# Altium PCB T12 holder part2.PcbDoc
Units mil, origin at the board's own origin, x right, y up, seen from the top; angles counter-clockwise.
Board outline 2915.05 x 434.1 mil, 2 copper layers (Top Layer, Bottom Layer); 10 components, 8 nets, 39 pads, 23 vias.
Unrouted connection lines stored in the file: 1.
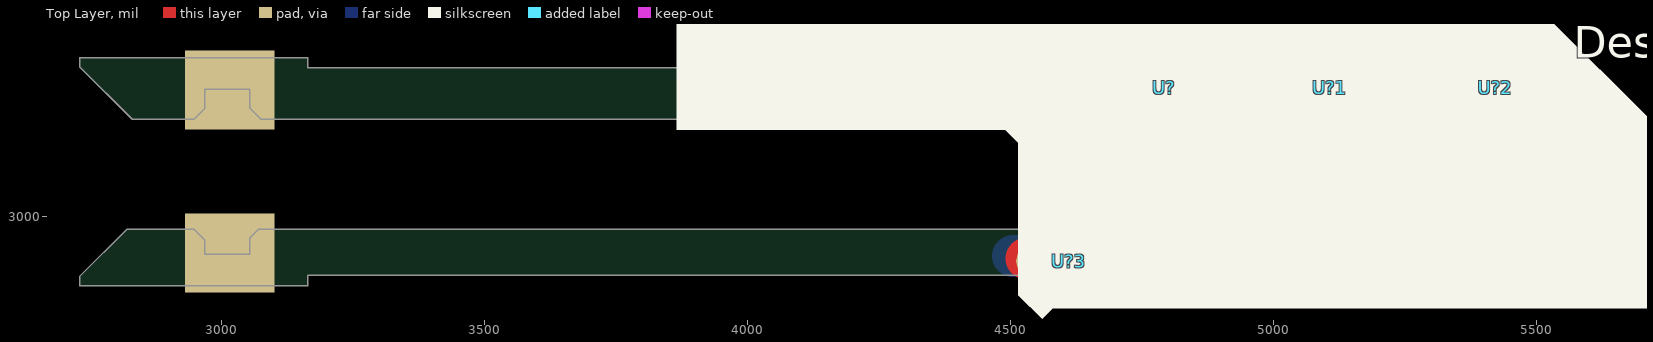
[diagram p0: Top Layer view]
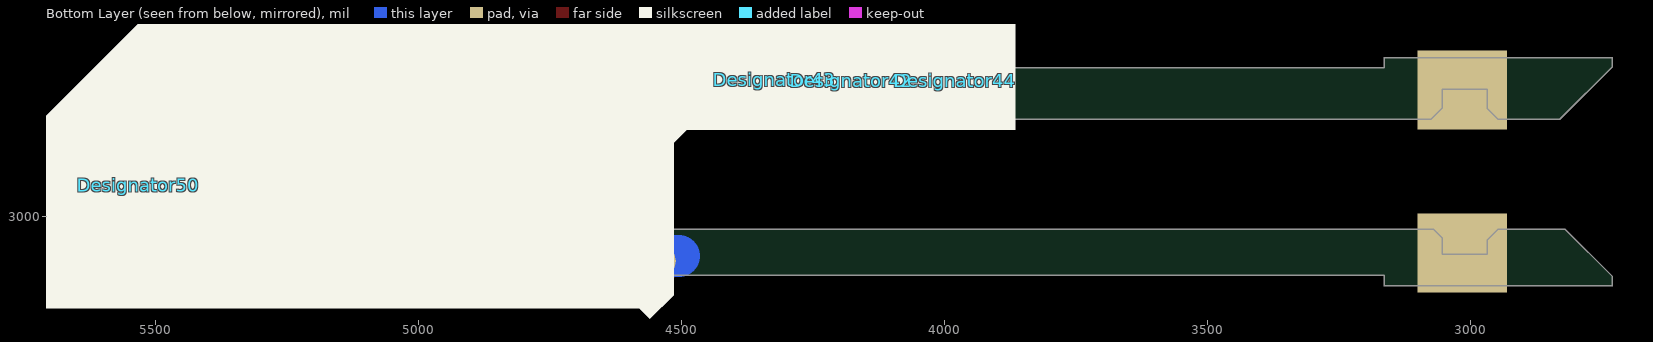
[diagram p1: Bottom Layer view, seen from below]
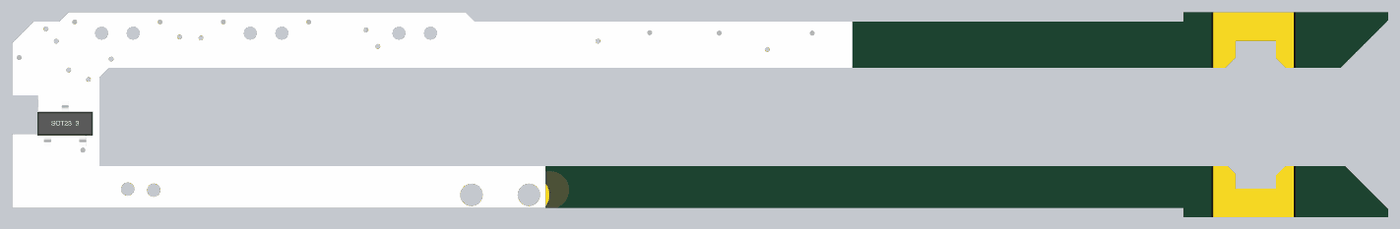
[diagram p2: 3D render of the assembled board from below, using the file's embedded part models]

## Layer stack, top to bottom
Top Solder: solder mask 0.4, Solder Resist, Dk 3.5
Top Layer: signal copper 1.4
Dielectric 1: dielectric 12.6, FR-4, Dk 4.8
Bottom Layer: signal copper 1.4
Bottom Solder: solder mask 0.4, Solder Resist, Dk 3.5

## Board outline
2729.49,2885 cw(c2730,2885) 2729.64,2885.36 2819.64,2975.36 cw(c2820,2975) 2820,2975.51 2946.85,2975.51 cw(c2946.85,2975) 2947.21,2975.36 2967.21,2955.36 cw(c2966.85,2955) 2967.37,2955 2967.37,2928.03 3052.95,2928.03 3052.95,2958.46 cw(c3053.46,2958.46) 3053.1,2958.83 3069.64,2975.36 cw(c3070,2975) 3070,2975.51 5459.48,2975.51 5459.48,3164.79 5439.79,3184.49 3075,3184.49 cw(c3075,3185) 3074.64,3184.64 3053.1,3206.17 cw(c3053.46,3206.54) 3052.95,3206.54 3052.95,3241.97 2967.37,3241.97 2967.37,3205 cw(c2966.85,3205) 2967.21,3204.64 2947.21,3184.64 cw(c2946.85,3185) 2946.85,3184.49 2830,3184.49 cw(c2830,3185) 2829.64,3184.64 2729.64,3284.64 cw(c2730,3285) 2729.49,3285 2729.49,3301.54 cw(c2730,3301.54) 2730,3302.05 3163.07,3302.05 cw(c3163.07,3301.54) 3163.59,3301.54 3163.59,3282.37 4664.21,3282.37 4683.74,3301.9 cw(c4684.11,3301.54) 4684.11,3302.05 5525,3302.05 cw(c5525,3301.54) 5525.36,3301.9 5544.9,3282.37 5598.93,3282.37 cw(c5598.93,3281.85) 5599.3,3282.21 5644.38,3237.13 cw(c5644.02,3236.77) 5644.53,3236.77 5644.53,3126.34 cw(c5644.02,3126.34) 5644.02,3125.82 5590.52,3125.82 5590.52,3044.18 5644.02,3044.18 cw(c5644.02,3043.66) 5644.53,3043.66 5644.53,2888.15 cw(c5644.02,2888.15) 5644.02,2887.63 3163.59,2887.63 3163.59,2868.46 cw(c3163.07,2868.46) 3163.07,2867.95 2730,2867.95 cw(c2730,2868.46) 2729.49,2868.46

## Design rules (kind name [scope] priority, off if disabled: settings)
Clearance [All] p1: gap=6 ignorepadtopadclearanceinfootprint=FALSE except(0: Arc-Hole Track-Hole SMDPad-Hole THPad-Hole Via-Hole Fill-Hole Poly-Hole Region-Hole Text-Hole)
PolygonConnect PolygonConnect_1 [All vs IsNamedPolygon('Top Layer-gnd') Or  IsNamedPolygon('Bottom Layer-gnd')] p1: connectstyle=Direct reliefconductorwidth=10 reliefentries=4 polygonreliefangle="90 Angle" airgapwidth=10
PolygonConnect [All] p2: connectstyle=Relief reliefconductorwidth=10 reliefentries=4 polygonreliefangle="90 Angle" airgapwidth=10
RoutingVias [All] p1: holewidth=28 width=50 viastyle="Through Hole" minholewidth=28 minwidth=50 maxholewidth=28 maxwidth=50
SolderMaskExpansion [All] p1: expansion=4
Width [All] p1: maxlimit=100 minlimit=6 preferedwidth=6 minimp=50.000000 maximp=50.000000 favimp=50.000000
30 further rules are at their usual default settings.

## Components (designator, comment, footprint, x,y, rotation, side; value= is the part's Value field where it differs from the comment)
Designator42 "Comment" 0603_R#1 4177.01,3258.24 r0 bottom
Designator43 "Comment" 0603_R#2 4322.99,3259.78 r0 bottom
Designator44 "Comment" 0603_R#1 3980,3258.24 r0 bottom
Designator49 "Comment" SOT23 -1995.71,3040 r270 bottom
Designator50 "Comment" SOT23 5569.8,3010 r180 bottom
Designator51 "Comment" SOD523 5585,3210 r270 top
U? "SW-SMD_TS-1086E-AC03526" SW-SMD_TS-1086E-AC03526-2 4792.03,3267.08 r0 top
U?1 "SW-SMD_TS-1086E-AC03526" SW-SMD_TS-1086E-AC03526-2 5107.03,3267.08 r0 top (schematic designator U?)
U?2 "SW-SMD_TS-1086E-AC03526" SW-SMD_TS-1086E-AC03526-2 5422.03,3267.08 r0 top (schematic designator U?)
U?3 "T12弹片" ? 4789.9,2915 r0 top (schematic designator U?)

## Footprints (in the part's own frame and the unit in brackets; to place one, negate y for a bottom-side part, rotate by r counter-clockwise, add the part's x,y. Pads: shape width x height; smd on the part's side, far side on the other; paste and mask are expansions set on the pad)
0603_R#1 [mm]
  rect 0.93x0.98 smd: 1(-0.77,0) 2(0.77,0)
  body extent -0.85,-0.4 0.85,0.4, height 0.56
0603_R#2 [mm]
  rect 0.93x0.98 smd: 2(0.77,0) vcc(-0.77,0)
  body extent -0.85,-0.4 0.85,0.4, height 0.56
SOD523 [mm]
  rect 0.7x0.5 smd: A(0.7,0) C(-0.6,0)
  body extent -0.8,-0.4 0.8,0.4, height 0.7
SOT23 [mm]
  rect 0.6x1.4 smd: D(0.95,2.514) G(0,0) S(1.9,0)
  silkscreen extent -0.55,1.02 2.45,1.97, body extent -0.56,0.22 2.44,2.62, height 1.05
SW-SMD_TS-1086E-AC03526-2 [mm]
  rect 0.9x0.597 smd: 1(-1.703,-1.524) 2(1.697,-1.524)
  rect 0.6x1.2 smd: 3(-2.303,0.375) 4(2.297,0.375)
  round 0.7 hole 0.7 unplated: ""(-0.853,-0.225) ""(0.847,-0.225)
  silkscreen extent -2.42,-1.62 2.41,1.9
? [mm]
  oval 2x1.7 hole 1.2: 1(-6.093,0)
  oval 2x1.7 hole 1.2 slot 1.205 at 0 deg: 1(-3.003,0)
  silkscreen extent -1.53,-0.54 6.97,0.63

## Free pads (board coordinates)
  rect 170x150 all layers, no hole: 2(3015,2930) 2(3015,3240)
  rect 120x230 smd: 2(5585,3020)
  rect 19.68x55.12 smd far side: 3(5475,3207.73) 3(5630,3206.24)

## Via types
v1: diameter 20, hole 10, Top Layer to Bottom Layer, 21 vias
v2: diameter 50, hole 28, Top Layer to Bottom Layer, 2 vias

## Nets (pads, with @x,y where several pads share a name; then routed paths per layer and width w, separated by ;. In a path a pad name is that pad's centre, name@x,y a point inside that pad or via, vN(x,y) a via of type N, cw(c..) or ccw(c..) an arc to the next point about the centre after c; other vN are vias at no path point)
+: 
-: Designator50.D Designator51.A pad.3@5475,3207.73 | length 217.2
  Top Layer w6: v1(5525,3180) 5573.16,3180 5578.16,3175 5585,3181.84 Designator51.A
  Bottom Layer w6: pad.3@5475,3197.12 pad.3@5475,3207.73
  Bottom Layer w10: pad.3@5475,3197.12 5513.27,3195.65 v1@5522.93,3185.99 ; v1(5525,3180) 5532.4,3172.6 Designator50.D Designator50.D@5532.4,3093.97
b1: Designator44.2 U?.1 | length 2694.1
  Top Layer w10: v1(4045,3223.55) 4058.55,3210 4718.11,3210 U?.1@4725,3203.11
  Bottom Layer w6: v1(4045,3223.55) 4225.04,3223.55 4233.79,3214.8 4417.83,3214.8 4457.34,3254.31 4692.94,3254.31 ; 4692.96,3254.33 4727.77,3254.33 4747.44,3234.66 4796.86,3234.66 4820.52,3211 4877.87,3211 4880.12,3213.25 5002.13,3213.25 5002.38,3213 5396.85,3213 5425,3241.15 5425,3271.85 5436.15,3283 5470.32,3283 5514.18,3239.14 5514.18,3226.02 5553.21,3186.99 5553.21,3077.69 5547.94,3072.41 5541.99,3072.41 5524.99,3055.41 5524.99,2968.04 5541.99,2951.03 5541.99,2937.01 5540.14,2935.16 5540.14,2925
  Bottom Layer w10: Designator44.2 v1(4045,3223.55)
  Bottom Layer w30: 5540.14,2895 5540.14,2925
b2: Designator42.2 U?1.1 | length 1990.5
  Top Layer w6: v1(4403.6,3241.08) 4414.68,3230 4840,3230 4859,3249 4881,3249 4922.92,3207.08 U?1.1 5131.66,3207.08 5159.58,3235 5198.78,3235 5248.78,3285 5294.85,3285 5310.57,3269.28 5310.57,3254.5 5315.84,3249.23 5346.92,3249.23 5352.19,3254.5 5352.19,3267.19 5370,3285 5475.49,3285 5485,3275.49 5485,3255 5493.06,3246.94 5520.14,3246.94 5522.43,3249.23 5528.01,3249.23 5545.97,3267.19 v1(5573.16,3267.19)
  Bottom Layer w6: Designator42.2@4221.61,3243.94 4238.76,3226.8 4389.31,3226.8 v1(4403.6,3241.08) ; v1(5573.16,3267.19) 5550.48,3267.19 5526.18,3242.88 5526.18,3230.99 5565.21,3191.96 5565.21,3072.72 5552.91,3060.41 5546.97,3060.41 5536.99,3050.44 5536.99,2973.01 5585,2925
  Bottom Layer w10: Designator42.2 4207.32,3257.25 4220.63,3243.94 Designator42.2@4221.61,3243.94
  Bottom Layer w30: 5585,2890 5585,2925
b3: Designator43.2 U?2.1 | length 1721.2
  Top Layer w6: U?2.1 5370.29,3222.38 5462.14,3222.38 5462.14,3222.55 5467.41,3227.83 5467.58,3227.83 5474.76,3235 5488.03,3235 5488.09,3234.94 5546.3,3234.94 5551.24,3239.88 v1(5551.24,3241.08)
  Top Layer w10: v1(5290,3250) 5291.91,3248.09 5291.91,3232.36 5321.16,3203.11 U?2.1@5355,3203.11
  Bottom Layer w6: Designator43.2@4367.6,3245.49 4388.42,3266.31 4687.97,3266.31 4706.66,3285 4947.35,3285 5007.35,3225 5265,3225 v1(5290,3250) ; v1(5551.24,3241.08) 5577.21,3215.11 5577.21,3067.74 5557.88,3048.41 5552.51,3048.41 5548.99,3044.9 5548.99,2977.98 5571.97,2955 5600,2955 5630,2925
  Bottom Layer w10: Designator43.2 4353.31,3258.8 4366.61,3245.49 Designator43.2@4367.6,3245.49
  Bottom Layer w30: 5630,2895 5630,2925
be: Designator50.G | length 79.8
  Bottom Layer w6: Designator50.G@5566.31,3025 5566.31,3012.74 5576.81,3002.25 5576.81,2998.19 5590,2985
  Bottom Layer w30: 5590,2985 5620,2985
gnd: Designator50.S U?1.2 U?1.3 U?1.4 U?2.2 U?2.3 U?2.4 U?.2 U?.3 U?.4 | length 261.2
  Top Layer w6: U?.2 4864.82,3207.08 U?.2@4873.57,3215.83 ; v1(4870,3230) v1@4873.57,3226.4 ; U?2.2@5488.75,3207.08 U?2.2 ; U?2.2@5489,3195.8 5489,3189.33 5502.23,3176.1 5502.23,3152.13 5495.72,3145.62 5495.72,3095.72 5474.76,3074.76 5474.76,3030 5494.76,3010 v1(5495,3010)
  Top Layer w10: U?2.2@5488.75,3207.08 5483.23,3201.56 U?2.2@5489,3195.8
  Top Layer w15: U?.2@4873.57,3215.83 v1@4873.57,3226.4
  other v1: 5245,3248.09 4895,3265 5016.38,3281.85 5197.48,3281.85 5331.38,3281.85 5512.48,3281.85
vcc: Designator42.1 Designator43.vcc Designator44.1 Designator51.C pad.3@5630,3206.24 | length 2756.3
  Top Layer w6: v1@5435,3210 5455,3210 5462.14,3202.86 5462.14,3191.6 5467.41,3186.33 5468.67,3186.33 5483.23,3171.77 v1(5483.23,3160) ; Designator51.C 5585,3229.68 Designator51.C@5591.84,3222.84
  Top Layer w10: v1(3949.69,3258.24) 3950.57,3259.12 v1(4294.12,3259.12) 4293.24,3258.24 v1(4146.69,3258.24) ; v1(5496.86,3060) 5509.72,3072.86 5509.72,3139.44 5525,3154.72 5619.72,3154.72 5630,3165 v1(5630,3206.24) 5613.4,3222.84 Designator51.C@5591.84,3222.84
  Bottom Layer w6: v1(3949.69,3258.24) 3949.69,3240.31 3985,3205 4036.68,3205 4037.13,3204.55 4052.87,3204.55 4053.32,3205 4226.62,3205 4228.82,3202.8 4422.8,3202.8 4462.31,3242.31 4697.91,3242.31 ; 4697.93,3242.33 4722.8,3242.33 4742.47,3222.66 4791.89,3222.66 4815.55,3199 4882.84,3199 4885.09,3201.25 4997.16,3201.25 4997.41,3201 5401.82,3201 5403.93,3203.11 v1(5435,3203.11) ; 5474.19,2967.1 5474.19,3054.12 5480.07,3060 ; 5480.07,2961.21 5480.68,2960.61 ; v1(5483.23,3160) 5483.23,3116.77 5496.86,3103.14 v1(5496.86,3060)
  Bottom Layer w10: 5474.19,2967.1 5480.07,2961.21 5480.07,2930.09 5482.87,2927.29 5498.88,2927.29 ; 5480.07,3060 v1(5496.86,3060)
  Bottom Layer w30: 5498.88,2895 5498.88,2927.29
pads on no net: Designator49.D Designator49.G Designator49.S U?1. U?2. U?3.1 U?.
copper on no net: | length 2157.5
  Top Layer w10: 4530,2920 4531.26,2935 ; 4625,2910 4640,2925 ; 5585,3020 5615,3010 5615,2915.86 5605.86,2925
  Top Layer w80: 4530,2920 4651.67,2920 ; 4640,2925 5605.86,2925
  Bottom Layer w80: 4505,2925 v2@5400,2925
  other v2: 5345,2925 5400,2927.29

## Polygon pours and split planes (outlines as drawn)
no net on Top Overlay (solid): 3865,3405 5525,3405 5525,3375 5715,3185 5710,3180 5710,2825 4580,2825 4560,2805 4515,2850 4515,3140 4490,3165 3865,3165
no net on Bottom Overlay (solid): 3865,3405 5525,3405 5525,3375 5715,3185 5710,3180 5710,2825 4580,2825 4560,2805 4515,2850 4515,3140 4490,3165 3865,3165
gnd on Bottom Layer "Bottom Layer-gnd" (solid, pour order 2): 4665,3281.85 4688.15,3305 5521.99,3305 5546.24,3280.75 5546.24,3281.85 5595,3281.85 5641.85,3235 5645,3235 5645,3203.11 3875,3203.11 3875,3281.85
gnd on Top Layer "Top Layer-gnd" (solid, pour order 0): 5545.25,3281.85 5525,3302.1 5525,3305 4686.85,3305 4663.7,3281.85 3875,3281.85 3875,3203.11 5645,3203.11 5645,3235 5641.85,3235 5595,3281.85

## Silkscreen, mask and mechanical layers (free items; w line width, h text height)
Bottom Solder:
  lines w30: 5498.88,2895 5498.88,2927.29 ; 5540,2895 5540,2925 ; 5585,2890 5585,2925 ; 5590,2985 5620,2985 ; 5630,2895 5630,2925
Mechanical 2:
  lines w1: 3053.46,3215 3053.46,3242.48 ; 3085,3183.43 3085,3183.46 ; 3053.46,3242.48 3053.46,3206.54 3075,3185 5440,3185 5460,3165 5460,2975 3070,2975 3053.46,2958.46 3053.46,2927.52 2966.85,2927.52 2966.85,2955 2946.85,2975 2820,2975 2730,2885 2730,2868.46 3163.07,2868.46 3163.07,2888.15 5644.02,2888.15 5644.02,3043.66 5590,3043.66 5590,3126.34 5644.02,3126.34 5644.02,3234.32 5644.02,3236.77 5598.93,3281.85 5593.35,3281.85 5544.69,3281.85 5525,3301.54 4684.11,3301.54 4664.42,3281.85 3163.07,3281.85 3163.07,3301.54 2730,3301.54 2730,3285 2830,3185 2946.85,3185 2966.85,3205 2966.85,3242.48 3053.46,3242.48